# Altium PCB PCB1.PcbDoc
Units mil, origin at the board's own origin, x right, y up, seen from the top; angles counter-clockwise.
Board outline 6000 x 4000 mil, 2 copper layers (Top Layer, Bottom Layer); 13 components, 13 nets, 60 pads, 11 vias.
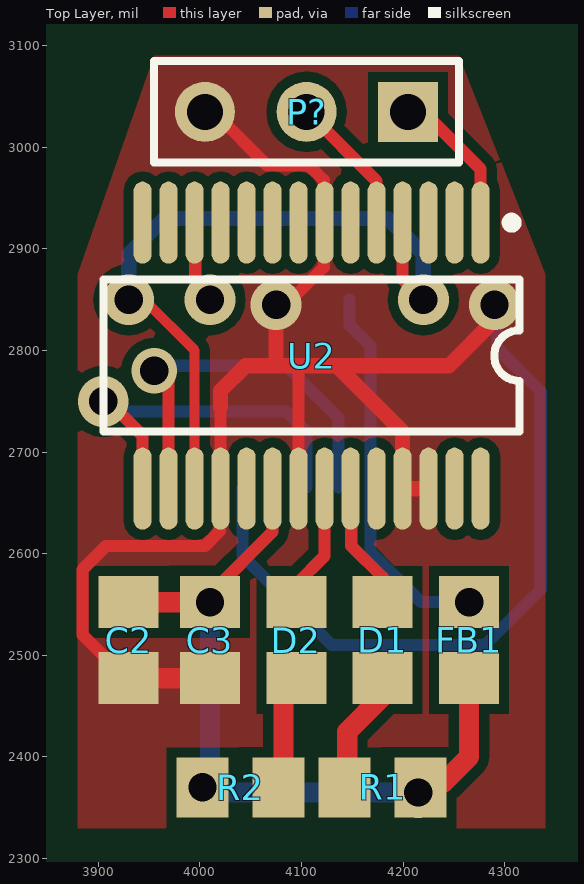
[diagram p0: Top Layer view]
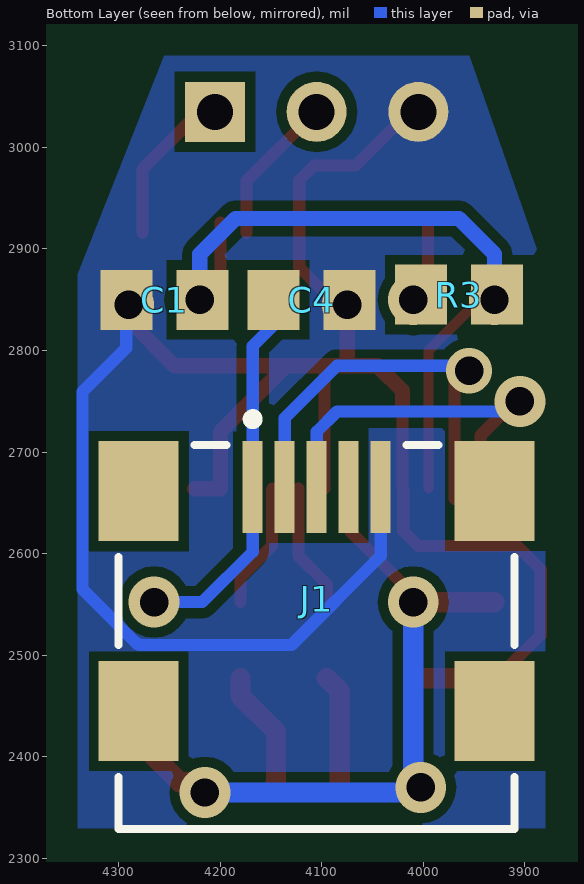
[diagram p1: Bottom Layer view, seen from below]

## Layer stack, top to bottom
Top Layer: signal copper 1.4
Dielectric: dielectric 12.6, FR-4, Dk 4.8
Bottom Layer: signal copper 1.4

## Board outline
1000,1000 7000,1000 7000,5000 1000,5000

## Design rules (kind name [scope] priority, off if disabled: settings)
Clearance [All] p1: gap=10
PolygonConnect [All] p1: connectstyle=Direct reliefconductorwidth=10 reliefentries=4 polygonreliefangle="90 Angle" airgapwidth=10
RoutingVias [All] p1: holewidth=28 width=50 viastyle="Through Hole" minholewidth=28 minwidth=50 maxholewidth=28 maxwidth=50
SolderMaskExpansion [All] p1: expansion=4
Width [All] p1: maxlimit=20 minlimit=10 preferedwidth=10
28 further rules are at their usual default settings.

## Components (designator, comment, footprint, x,y, rotation, side; value= is the part's Value field where it differs from the comment)
C1 "Cap_UP" 2012[0805] 4255,2850 r180 bottom
C2 "Cap_UP" 2012[0805] 3930,2515 r90 top
C3 "Cap_El" 2012[0805] 4010,2515 r270 top
C4 "Cap_UP" 2012[0805] 4110,2850 r0 bottom
D1 "Diode" 2012[0805] 4180,2515 r90 top
D2 "Diode" 2012[0805] 4095,2515 r90 top
FB1 "Ferrite Beed" 2012[0805] 4265,2515 r90 top
J1 "USB" USB_Mini 4105,2510 r180 bottom
P? "Encoder 1" HDR1X3 4205,3035 r180 top
R1 "Res" 2012[0805] 4180,2370 r0 top
R2 "Res" 2012[0805] 4040,2370 r180 top
R3 "Res" 2012[0805] 3965,2855 r180 bottom
U2 "FT232RL" SSOP28 4110,2795 r180 top

## Footprints (in the part's own frame and the unit in brackets; to place one, negate y for a bottom-side part, rotate by r counter-clockwise, add the part's x,y. Pads: shape width x height; smd on the part's side, far side on the other; paste and mask are expansions set on the pad)
2012[0805] [mm] "Chip Resistor; Body 2.0 x 1.3 mm (LxW typ)"
  rect 1.3x1.5 smd: 1(-0.95,0) 2(0.95,0)
  body extent -1.22,-0.75 1.28,0.75, height 0.5
HDR1X3 [mm] "Connector; Header; 3 Position"
  rect 1.5x1.5 hole 0.9: 1(0,0)
  round 1.5 hole 0.9: 2(2.54,0) 3(5.08,0)
  silkscreen extent -1.27,-1.27 6.35,1.27
SSOP28 [mm] "SSOP; 28 Leads; Body Width 5.3 mm; Pitch 0.65 mm"
  oval 0.45x2.05 smd: 1(-4.225,-3.325) 2(-3.575,-3.325) 3(-2.925,-3.325) 4(-2.275,-3.325) 5(-1.625,-3.325) 6(-0.975,-3.325) 7(-0.325,-3.325) 8(0.325,-3.325) 9(0.975,-3.325) 10(1.625,-3.325) 11(2.275,-3.325) 12(2.925,-3.325) 13(3.575,-3.325) 14(4.225,-3.325) 15(4.225,3.325) 16(3.575,3.325) 17(2.925,3.325) 18(2.275,3.325) 19(1.625,3.325) 20(0.975,3.325) 21(0.325,3.325) 22(-0.325,3.325) 23(-0.975,3.325) 24(-1.625,3.325) 25(-2.275,3.325) 26(-2.925,3.325) 27(-3.575,3.325) 28(-4.225,3.325)
  silkscreen extent -5.2,-3.45 5.2,1.9, body extent -5.2,-2.4 5.23,2.42, height 2
USB_Mini [mm]
  rect 0.5x2.3 smd: 1(-1.6,3.95) 2(-0.8,3.95) 3(0,3.95) 4(0.8,3.95) 5(1.6,3.95)
  rect 2x2.5 smd: 6(4.45,3.85) 7(4.45,-1.65) 8(-4.45,3.85) 9(-4.45,-1.65)
  silkscreen extent -4.95,-4.6 4.95,5.77

## Part data
C1 C2 C3 C4: "Capacitor"
D1 D2: "1 Amp General Purpose Rectifier"
J1: "USB 1.1, Right Angle, Thru-Hole, A Type, Receptacle, 4 Position, Black"
P?: library part "Header 3B", "Header, 3-Pin"
R1 R2 R3: "Semiconductor Resistor"

## Via types
v1: diameter 50, hole 28, Top Layer to Bottom Layer, 10 vias
v2: diameter 45, hole 28, Top Layer to Bottom Layer, 1 vias

## Nets (pads, with @x,y where several pads share a name; then routed paths per layer and width w, separated by ;. In a path a pad name is that pad's centre, name@x,y a point inside that pad or via, vN(x,y) a via of type N, cw(c..) or ccw(c..) an arc to the next point about the centre after c; other vN are vias at no path point)
3.3V: C1.2 R3.2 U2.4 U2.17 | length 714.9
  Top Layer w10: v1(3930,2850) 3945,2850 3994.84,2800.16 U2.17
  Top Layer w12: U2.4 4199.57,2870.43 v1(4220,2850)
  Bottom Layer w15: v1(3930,2850) 3930,2895 3965,2930 4185,2930 4220,2895 v1(4220,2850)
DM: J1.2 U2.16 | length 381.7
  Top Layer w12: U2.16@3969.25,2654.09 v2@3969.25,2780
  Bottom Layer w12: v2@3970,2785 4085,2785 4136.5,2733.5 J1.2
  other v2: 3955,2780
DP: J1.3 U2.15 | length 345.6
  Top Layer w12: 3925,2735 3943.66,2716.34 U2.15
  Bottom Layer w12: v1(3905,2750) 3915,2740 4085,2740 4105,2720 J1.3
GND: C1.1 C2.1 C3.2 C4.1 J1.5 P?.3 U2.7 U2.18 U2.21 U2.25 U2.26 | length 2161.7
  Top Layer w12: C2.1 3927.06,2477.6 3884.47,2520.18 3884.47,2584.62 3907.59,2607.74 4005.14,2607.74 4019.7,2622.3 4019.7,2663.36 U2.18 4020.43,2745 ; P?.3@4013.7,3035 4066.44,2982.26 4107.5,2982.26 4122.06,2967.7 U2.7@4122.06,2925.17 ; v1(4075,2845) 4085,2845 4122.06,2882.06 U2.7@4122.06,2925.17 ; U2.21 4097.2,2785 ; U2.7 U2.7@4122.06,2925.17
  Top Layer w15: 4020.43,2745 4020.43,2760.43 4045,2785 4075,2785 ; v1(4075,2845) 4075,2785 ; U2.26 U2.25 4199.57,2720.43 4135,2785 ; v1@4290,2830 4245,2785 4135,2785 ; 4075,2785 4097.2,2785 4135,2785
  Top Layer w20: C2.1 C3.2
  Bottom Layer w12: J1.5 4042.01,2597.99 4129.75,2510.25 4280,2510.25 4281.15,2511.4 4281.98,2511.4 4335.57,2564.99 4335.57,2759.43 4292.4,2802.6 4292.4,2842.6 v1(4290,2845) ; C1.1@4292.4,2845 C1.1 C1.1@4292.4,2852.94
NetC4_2: C4.2 FB1.2 J1.1 | length 374.1
  Bottom Layer w12: C4.2 4147.4,2825 4167.99,2804.41 J1.1 4167.99,2602.01 4217.6,2552.4 v1(4265,2552.4)
NetD1_1: D1.1 R1.1 | length 117.2
  Top Layer w20: R1.1@4145.2,2375 4145,2375.2 4145,2425 4180,2460 D1.1
NetD1_2: D1.2 U2.23 | length 124.8
  Top Layer w12: U2.23 4149.12,2663.36 4149.12,2607.74 4180,2576.86 D1.2
NetD2_1: D2.1 R2.1 | length 107.8
  Top Layer w20: R2.1@4082.4,2375 4082.4,2465 D2.1
NetD2_2: D2.2 U2.22 | length 123.2
  Top Layer w12: D2.2 4095,2570 4122.8,2597.8 U2.22
NetR3_1: R3.1 U2.12 | length 112.2
  Top Layer w12: U2.12 3995.58,2925.17 3995.58,2859.42 4005,2850 4010,2855 4010,2865 v1(4010,2850)
RXD: P?.2 U2.5 | length 163.2
  Top Layer w12: P?.2@4105,3050 P?.2 4105.94,3035 4173.98,2966.97 U2.5@4173.98,2915.91
TXD: P?.1 U2.1 | length 163.6
  Top Layer w12: P?.1@4205,3050 4276.34,2978.66 U2.1@4276.34,2915.91
VCC: C2.2 C3.1 FB1.1 R1.2 R2.2 U2.20 | length 762.2
  Top Layer w12: v1(4010,2552.4) 4010,2560 4071.61,2621.61 U2.20
  Top Layer w20: C2.2 v1(4010,2552.4) ; v1(4215,2365) 4215,2370 4220,2375 4240,2375 4265,2400 FB1.1
  Bottom Layer w20: v1(4010,2552.4) 4010,2377.4 v1(4002.6,2370) 4007.6,2365 v1(4215,2365)
pads on no net: J1.4 J1.6 J1.7 J1.8 J1.9 U2.2 U2.3 U2.6 U2.8 U2.9 U2.10 U2.11 U2.13 U2.14 U2.19 U2.24 U2.27 U2.28

## Polygon pours and split planes (outlines as drawn)
GND on Bottom Layer "Top Layer-No Net 1" (solid, pour order 4): 4255,3090 3955,3090 3880,2875 3880,2330 4340,2330 4340,2875 4255,3090
GND on Top Layer "Top Layer-No Net 1" (solid, pour order 6): 4255,3090 3955,3090 3880,2875 3880,2330 4340,2330 4340,2875 4255,3090

## Silkscreen, mask and mechanical layers (free items; w line width, h text height)
Mechanical 1:
  lines w10: 3870,2320 4350,2320 4350,2875 4260,3100 3950,3100 3870,2875 3870,2320